# EAGLE board untitled_double_sided (EAGLE 6.1)
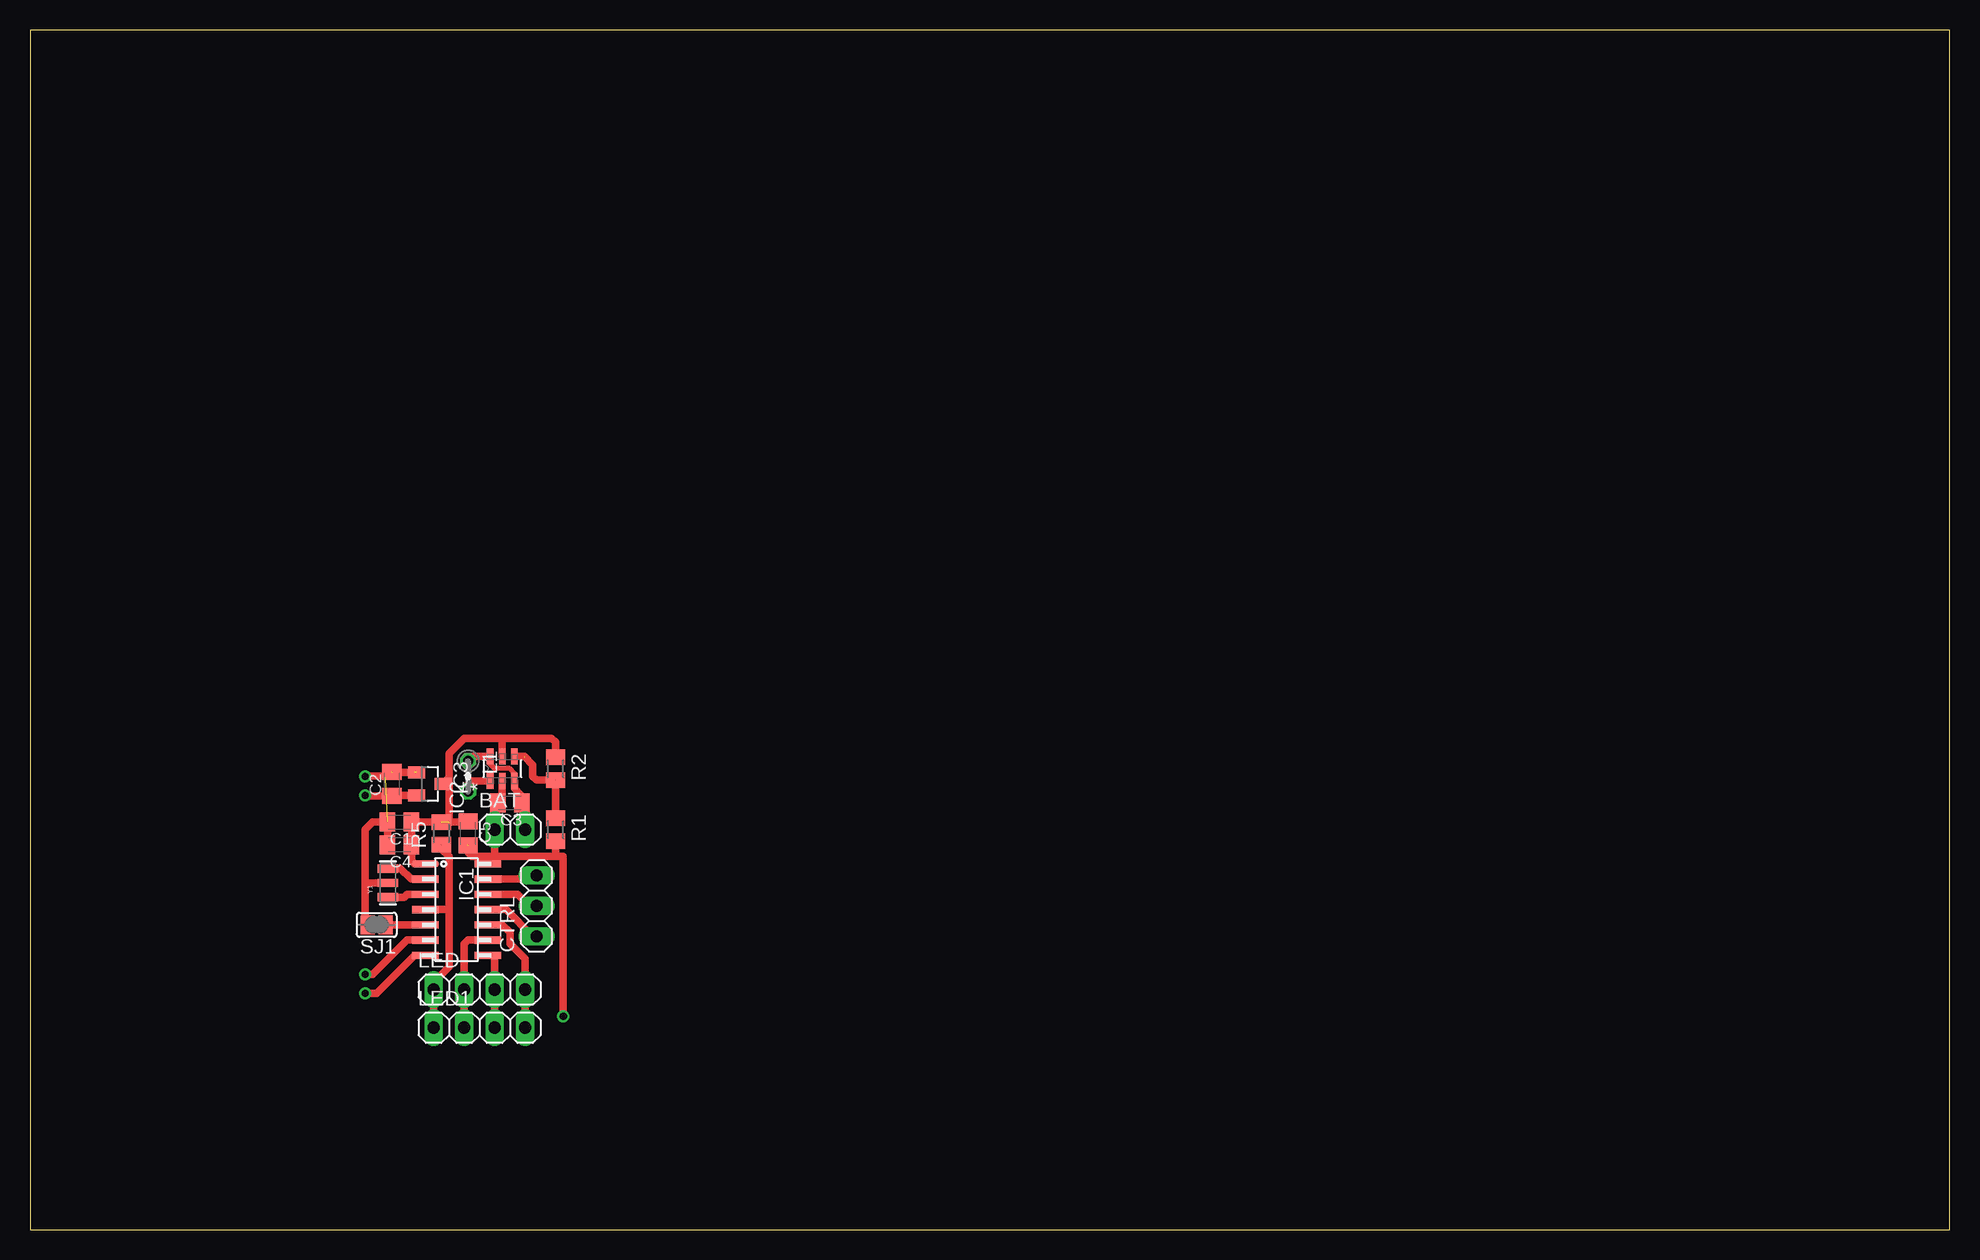
[diagram p0: board, top side]
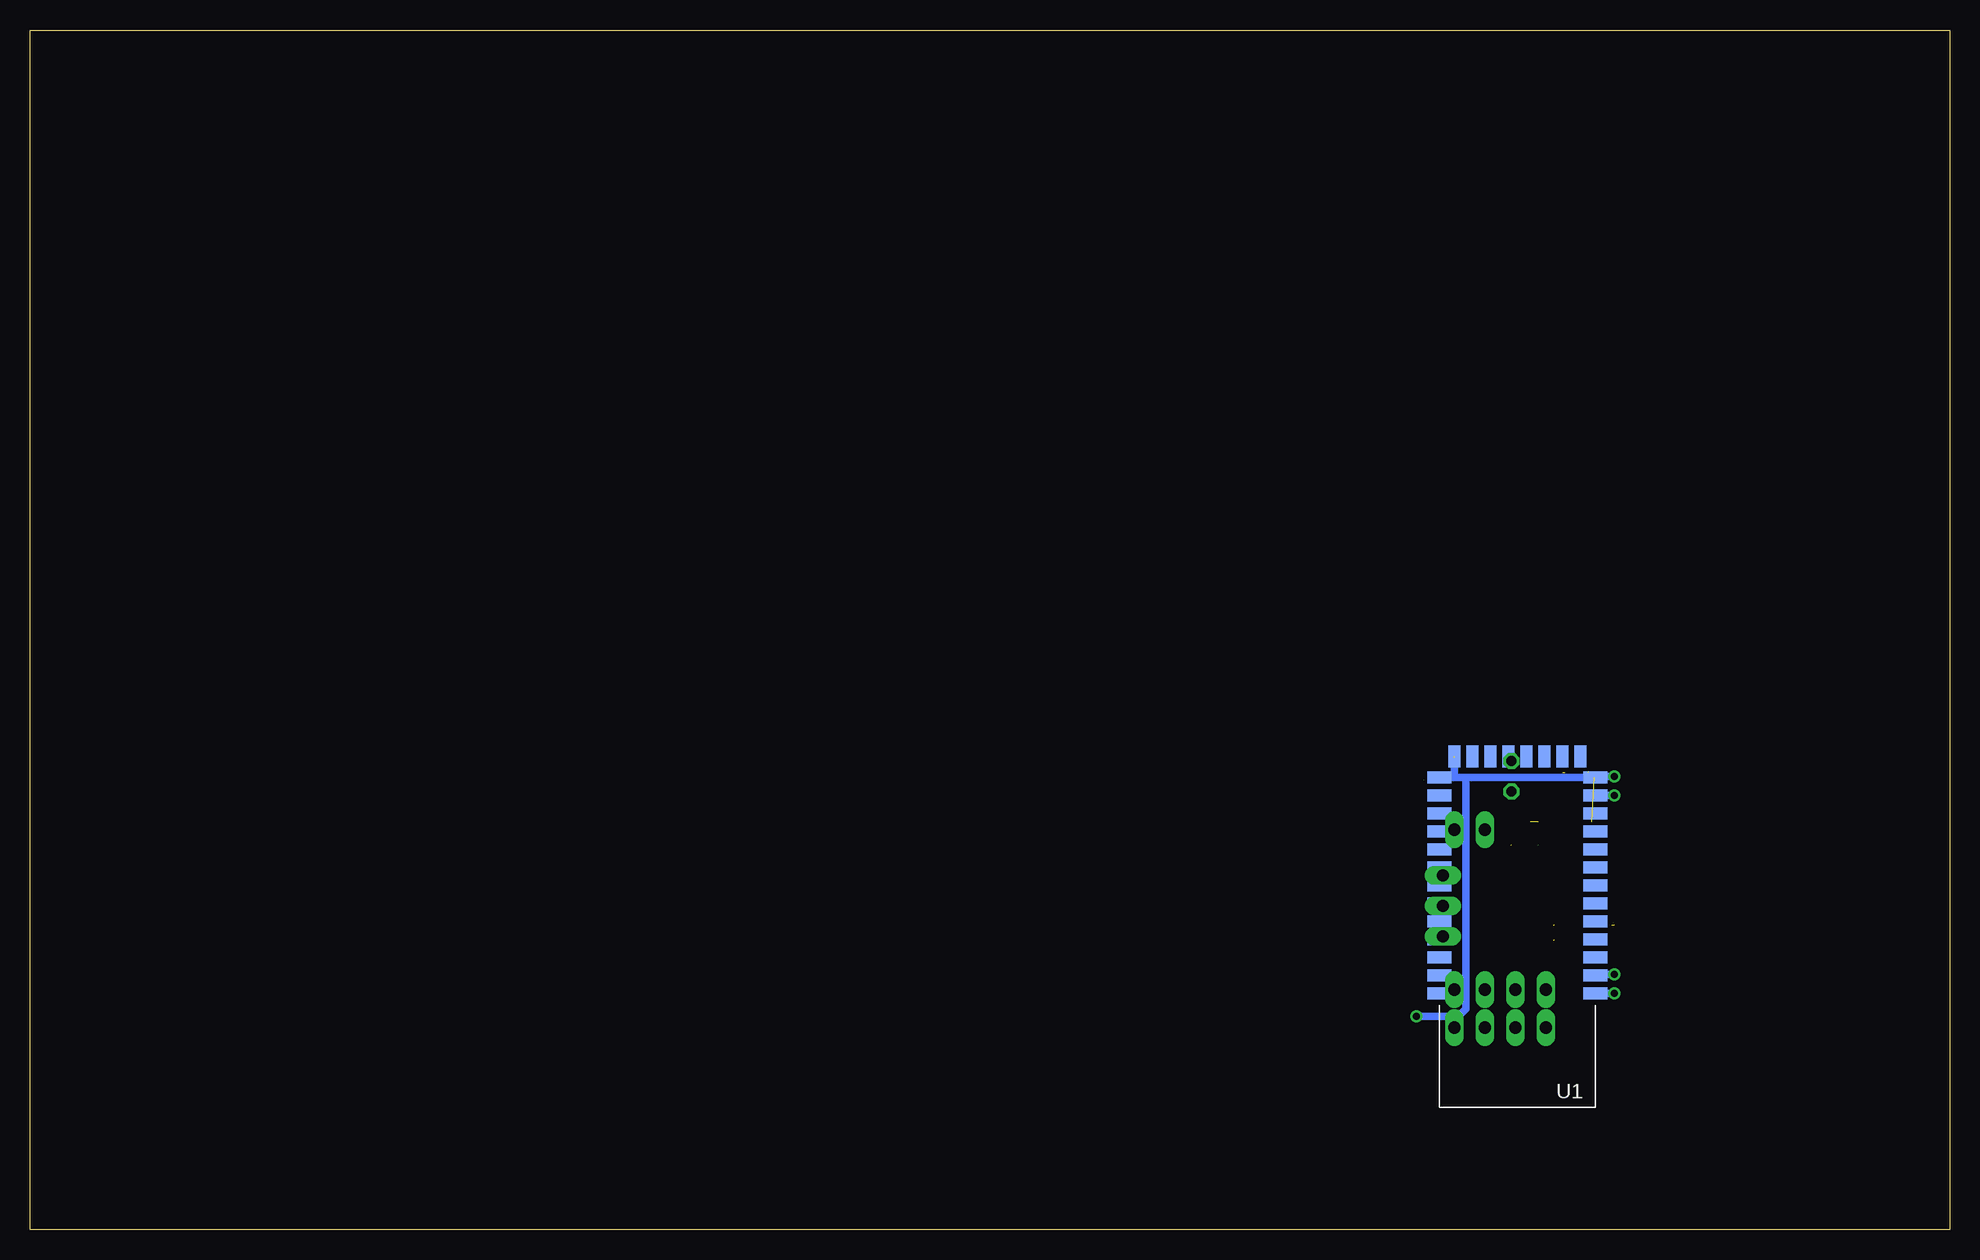
[diagram p1: board, bottom side, seen from below]

Size 160 x 100 mm. Coordinates in mm from the lower left corner, seen from the top.
Outline: 0,0 160,0 160,100 0,100 0,0
Copper layers (1*16): Top 0.035mm / dielectric 1.5mm / Bottom 0.035mm
Design rules: minimum track width 10mil, minimum drill 24mil, track to track 8mil, track to pad 8mil, pad to pad 8mil, via to via 8mil, smd to smd 8mil, copper to edge 40mil, drill to drill 8mil, minimum pad ring 10mil, minimum via ring 8mil, stop-mask expansion 4mil, vias tented up to drill 0mil, thermal gap 10mil

## Footprints (pad centres in the part's own frame; a part is rotated, then mirrored left to right if it is on the bottom)
1X02 = drill 1.016 long: 1 -1.27,0; 2 1.27,0
C0805K = smd 1.3 x 1.6: 1 -1,0; 2 1,0
1X03 = drill 1.016 long: 1 -2.54,0; 2 0,0; 3 2.54,0
SOIC14 = smd 0.61 x 2.21: 1 -3.81,-2.603; 2 -2.54,-2.603; 3 -1.27,-2.603; 4 0,-2.603; 5 1.27,-2.603; 6 2.54,-2.603; 7 3.81,-2.603; 8 3.81,2.603; 9 2.54,2.603; 10 1.27,2.603; 11 0,2.603; 12 -1.27,2.603; 13 -2.54,2.603; 14 -3.81,2.603
SOT23-6 = smd 1.321 x 0.559: 1 -1.016,1.016; 2 -1.016,0; 3 -1.016,-1.016; 4 1.016,-1.016; 5 1.016,0; 6 1.016,1.016
SOT23 = smd 1 x 1.4: 1 -0.95,-1.1; 2 0.95,-1.1; 3 0,1.1
0204V = drill 0.813 octagon: 1 -1.27,0; 2 1.27,0
1X04 = drill 1.016 long: 1 -3.81,0; 2 -1.27,0; 3 1.27,0; 4 3.81,0
M0805 = smd 1.3 x 1.6: 1 -0.95,0; 2 0.95,0
SJ = smd 1.168 x 1.6: 1 -0.762,0; 2 0.762,0
BLUETOOTH_SMD = smd 2 x 1: 1 0,0; 2 0,-1.5; 3 0,-3; 4 0,-4.5; 5 0,-6; 6 0,-7.5; 7 0,-9; 8 0,-10.5; 9 0,-12; 10 0,-13.5; 11 0,-15; 12 0,-16.5; 13 0,-18; 22 13,-18; 23 13,-16.5; 24 13,-15; 25 13,-13.5; 26 13,-12; 27 13,-10.5; 28 13,-9; 29 13,-7.5; 30 13,-6; 31 13,-4.5; 32 13,-3; 33 13,-1.5; 34 13,0 | smd 1 x 1.8: 14 1.25,-19.75; 15 2.75,-19.75; 16 4.25,-19.75; 17 5.75,-19.75; 18 7.25,-19.75; 19 8.75,-19.75; 20 10.25,-19.75; 21 11.75,-19.75
RESONATOR-SMD = smd 0.7 x 1.7: 1 -1.2,0; 2 0,0; 3 1.2,0

## Placement (x,y rotation side)
BAT  [1X02]  40.01,33.34 0 top
C1  [C0805K]  30.8,33.97 180 top
C2  [C0805K]  30.16,37.15 90 top
C3  [C0805K]  40.01,35.56 180 top
C4  [C0805K]  30.8,32.07 180 top
C5  [C0805K]  36.51,33.02 270 top
CTRL  [1X03]  42.23,26.99 90 top
IC1  [SOIC14]  35.56,26.67 270 top
IC2  MCP1640  [SOT23-6]  39.37,38.42 90 top
IC3  [SOT23]  33.34,37.15 270 top
L1  [0204V]  36.51,37.78 270 top
LED  [1X04]  37.47,20 0 top
LED1  [1X04]  37.47,16.83 0 top
R1  [M0805]  43.81,33.34 270 top
R2  [M0805]  43.81,38.42 270 top
R5  [M0805]  34.29,33.02 90 top
SJ1  [SJ]  28.89,25.4 180 top
U1  HC_05  [BLUETOOTH_SMD]  29.53,19.68 180 bottom
Y1  8MHZ  [RESONATOR-SMD]  29.84,28.89 90 top

## Library data of the parts
BAT CTRL LED LED1 = pinhead
C1-C5 L1 R1 R2 R5 = rcl
IC1 = atmel_tiny24-44-84tiny48-88mega48-88-168-328
IC2 = SteveMarple
IC3 = _MY_OWN_LIB
SJ1 = jumper
U1 = SerialPortBluetooth
Y1 = SparkFun-FreqCtrl; PROD_ID: XTAL-08895

## Nets
GND: BAT.1 C1.2 C2.2 C3.2 C4.2 C5.2 IC1.14 IC2.2 IC3.1 R1.2 SJ1.2 U1.13 U1.21 U1.22 Y1.2
N$1: IC1.3 Y1.1
N$2: IC1.2 Y1.3
N$3: IC1.7 U1.1
N$4: CTRL.1 IC1.11
N$5: IC1.6 U1.2
N$6: IC1.8 LED1.3 LED.3
N$7: CTRL.2 IC1.12
N$8: CTRL.3 IC1.13
N$9: IC1.9 LED1.2 LED.2
N$10: C2.1 IC3.2 U1.12
N$12: IC1.5 SJ1.1
N$13: BAT.2 C3.1 IC2.3 IC2.6 L1.1
N$14: IC2.4 R1.1 R2.2
N$16: IC2.1 L1.2
N$17: IC1.4 LED1.1 LED.1 R5.1
N$20: IC1.10 LED1.4 LED.4
VCC: C1.1 C4.1 C5.1 IC1.1 IC2.5 IC3.3 R2.1 R5.2

## Tracks (layer width: path | path; a pad name or v marks a point on that pad's centre or on a via)
GND  (via drill 0.6)  (6 unrouted)
  Top 0.61: 38.42,30.48 IC1.14 38.73,31.05 38.73,31.11 | 38.73,31.11 43.81,31.11 | 43.81,31.11 44.45,31.11 v44.45,17.78 | 43.81,31.11 R1.2 | 38.73,31.11 BAT.1 38.73,35.29 C3.2 39.37,35.92 IC2.2 | 38.73,31.11 36.83,31.11 36.51,31.43 36.51,32.07 | Y1.2 27.94,28.89 | 27.94,28.89 27.94,33.34 28.57,33.97 C1.2 | C1.2 29.84,33.97 | C4.2 C1.2 | 27.94,28.89 27.94,25.4 | v27.94,37.78 27.99,37.83 29.89,37.83 30.16,38.1 32.07,38.1
  Bottom 0.61: 41.27,37.69 41.27,39.37 | U1.22 41.27,37.69 | 40.32,37.69 U1.13 | U1.13 29.62,37.69 29.53,37.78 U1.13 | 41.27,37.69 40.32,37.69 | 40.32,37.69 40.32,18.41 40.96,17.78 v44.45,17.78 | U1.13 28.99,37.69 28.89,37.78 v27.94,37.78
N$1
  Top 0.61: Y1.1 31.18,27.69 31.43,27.94 IC1.3
N$2
  Top 0.61: Y1.3 30.87,30.09 31.75,29.21 IC1.2
N$3  (via drill 0.6)
  Top 0.61: IC1.7 32.07,22.86 28.89,19.68 v27.94,19.68
  Bottom 0.61: v27.94,19.68 U1.1
N$4
  Top 0.61: IC1.11 39.69,26.67 41.91,24.45 CTRL.1
N$5  (via drill 0.6)  (1 unrouted)
  Top 0.61: 33.02,24.13 31.43,24.13 28.57,21.27 v27.94,21.27
  Bottom 0.61: U1.2 29.53,21.27 v27.94,21.27
N$6
  Top 0.61: IC1.8 38.73,22.86 LED.3 LED1.3
N$7
  Top 0.61: IC1.12 40.64,27.94 41.59,26.99 CTRL.2
N$8
  Top 0.61: IC1.13 41.91,29.21 CTRL.3
N$9
  Top 0.61: IC1.9 36.51,24.13 36.2,23.81 LED.2 LED1.2
N$10  (via drill 0.6)
  Top 0.61: IC3.2 30.21,36.2 C2.1 27.99,36.15 v27.94,36.2
  Bottom 0.61: U1.12 28.9,36.19 28.89,36.2 v27.94,36.2
N$12  (1 unrouted)
  Top 0.61: SJ1.1 33.02,25.4
N$13
  Top 0.406: IC2.3 40.39,38.04 40.01,38.42 38.73,38.42 38.35,38.8 IC2.6
  Top 0.61: BAT.2 41.27,35.29 C3.1 40.96,35.61 40.96,36.2 40.39,36.77 IC2.3 | IC2.6 36.89,39.43 L1.1
N$14  (1 unrouted)
  Top 0.61: R1.1 R2.2 | IC2.4 41.21,39.43 41.91,38.73 41.91,37.78 42.23,37.47 R2.2
N$16
  Top 0.61: IC2.1 36.77,37.4 36.51,37.15 L1.2
N$17  (1 unrouted)
  Top 0.61: IC1.4 34.92,26.67 | LED1.1 LED.1 33.66,20.64 34.92,21.91 34.92,26.67 | 34.92,26.67 34.92,31.11 34.29,31.75 R5.1
N$20
  Top 0.61: IC1.10 39.37,25.4 40.01,24.77 40.01,23.81 41.27,22.54 LED.4 LED1.4
VCC  (1 unrouted)
  Top 0.61: R2.1 43.81,40.64 43.5,40.96 39.37,40.96 | 39.37,40.96 IC2.5 | IC1.1 32.07,30.48 31.8,30.75 C4.1 C1.1 R5.2 36.46,33.97 C5.1 | 39.37,40.96 36.2,40.96 34.92,39.69 34.92,37.78 | 34.92,37.78 34.92,33.97 | IC3.3 34.92,37.78